# EAGLE board roco1044 (EAGLE 9.5.2)
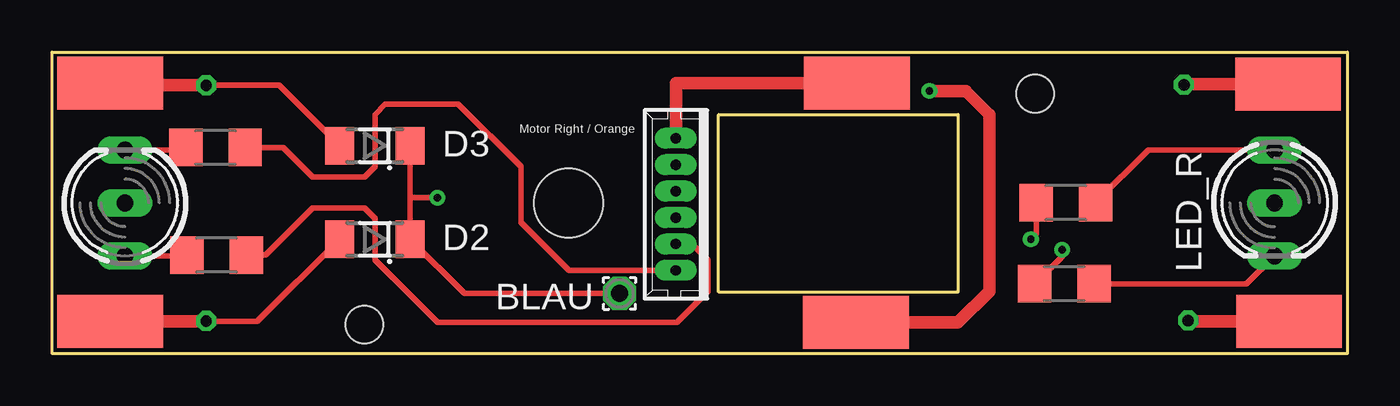
[diagram p0: board, top side]
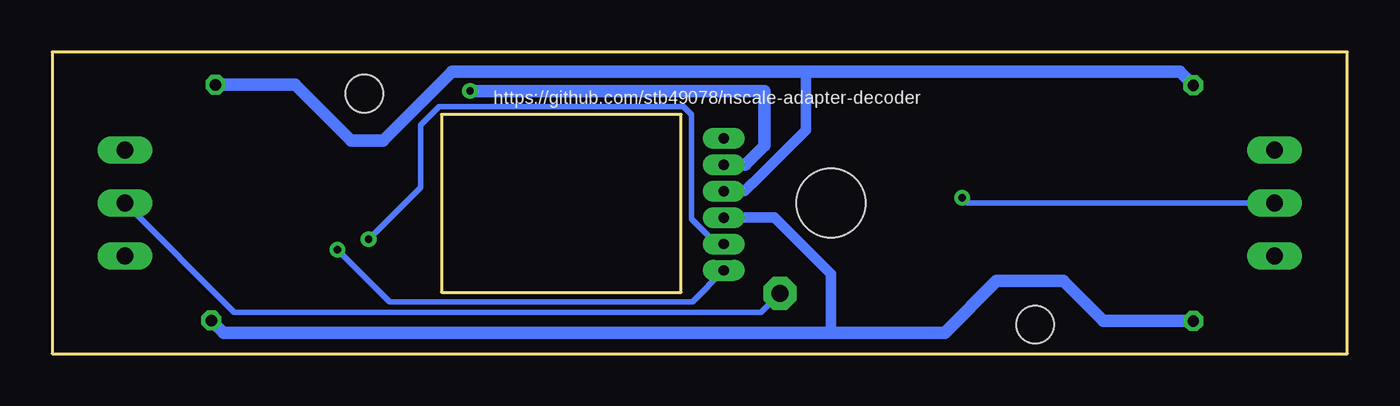
[diagram p1: board, bottom side, seen from below]

Size 62.2 x 14.5 mm. Coordinates in mm from the lower left corner, seen from the top.
Outline: 0,0 0,14.5 62.2,14.5 62.2,0 0,0
Copper layers (1*16): Top 0.035mm / dielectric 1.5mm / Bottom 0.035mm
Design rules "default *": minimum track width 6mil, minimum drill 0.35mm, track to track 6mil, track to pad 6mil, pad to pad 6mil, via to via 6mil, smd to smd 6mil, copper to edge 20mil, drill to drill 6mil, minimum pad ring 10mil, minimum via ring 8mil, stop-mask expansion 4mil, vias tented up to drill 0mil, thermal gap 10mil
Holes 1.8 mm at 15,1.4 47.2,12.5
Holes 3.3 mm at 24.8,7.25
Milling: 4 lines

## Footprints (pad centres in the part's own frame; a part is rotated, then mirrored left to right if it is on the bottom)
53047-06 = drill 0.5 pad 0.698 long: 1 3.175,0; 2 1.905,0; 3 0.635,0; 4 -0.635,0; 5 -1.905,0; 6 -3.175,0
1,6/0,8 = drill 0.813 pad 1.6 octagon: 1 0,0
SOD80_DO213AA_MINIMELF = smd 1.4 x 1.8: A 1.7,0; C -1.7,0
DUOLED-A-5MM = drill 0.813 long: A 0,0; CR 2.54,0; CX -2.54,0
SMD2,54-5,08 = smd 2.54 x 5.08: 1 0,0
R1206 = smd 1.6 x 1.803: 1 -1.422,0; 2 1.422,0

## Placement (x,y rotation side)
651  NEM_651-TS  [53047-06]  29.95,7.18 90 top
BLAU  [1,6/0,8]  27.25,2.9 180 top
D2  LL4148  [SOD80_DO213AA_MINIMELF]  15.5,5.5 180 top
D3  LL4148  [SOD80_DO213AA_MINIMELF]  15.5,10 180 top
LED_F  [DUOLED-A-5MM]  3.5,7.25 90 top
LED_R  [DUOLED-A-5MM]  58.7,7.25 270 top
M-L  [SMD2,54-5,08]  38.6,1.5 90 top
M-R  [SMD2,54-5,08]  38.65,13 90 top
R1  [R1206]  48.61,3.36 0 top
R2  [R1206]  48.68,7.26 0 top
R3  [R1206]  7.85,9.91 0 top
R4  [R1206]  7.91,4.74 0 top
TR-L-1  [SMD2,54-5,08]  2.8,1.55 90 top
TR-L-2  [SMD2,54-5,08]  59.4,1.55 90 top
TR-R-1  [SMD2,54-5,08]  2.8,13 90 top
TR-R-2  [SMD2,54-5,08]  59.35,12.95 270 top

## Library data of the parts
651 = con-nem
BLAU M-L M-R TR-L-1 TR-L-2 TR-R-1 TR-R-2 = wirepad
D2 D3 = _hhn_diodes_smd
LED_F LED_R = led
R1-R4 = rcl; SPICEPREFIX: R

## Nets
M-L: 651.2 M-L.1
M-R: 651.1 M-R.1
N$1: BLAU.1 D2.C D3.C LED_F.A LED_R.A
N$2: 651.4 D2.A TR-L-1.1 TR-L-2.1
N$3: 651.3 D3.A TR-R-1.1 TR-R-2.1
N$5: 651.5 R2.1 R4.2
N$6: LED_R.CR R1.2
N$7: LED_R.CX R2.2
N$8: 651.6 R1.1 R3.2
N$9: LED_F.CR R3.1
N$10: LED_F.CX R4.1

## Tracks (layer width: path | path; a pad name or v marks a point on that pad's centre or on a via)
M-L  (via drill 0.35)
  Top 0.61: M-L.1 43.5,1.5 45,3 45,11.5 43.87,12.63 v42.13,12.63
  Bottom 0.61: v42.13,12.63 28,12.63 28,10 28.91,9.09 651.2
M-R
  Top 0.61: M-R.1 29.95,13 651.1
N$1  (via drill 0.35)
  Top 0.254: BLAU.1 19.8,2.9 D2.C 17.2,7.5 | 17.2,7.5 D3.C | v18.5,7.5 17.2,7.5
  Bottom 0.254: LED_R.A 53.45,2 28.15,2 BLAU.1 | LED_F.A 18.25,7.25 v18.5,7.5
N$2  (via drill 0.55)
  Top 0.254: D2.A 9.85,1.55 7.35,1.55
  Top 0.61: v54.55,1.6 54.6,1.55 TR-L-2.1 | TR-L-1.1 7.35,1.55 7.4,1.5 v7.4,1.57
  Bottom 0.508: 651.4 27.51,6.54 24.8,3.84 24.8,1.02
  Bottom 0.61: v7.4,1.57 11.72,1.57 13.65,3.5 16.85,3.5 19.33,1.02 24.8,1.02 53.97,1.02 v54.55,1.6
N$3  (via drill 0.55)
  Top 0.254: D3.A 10.9,12.9 7.5,12.9
  Top 0.61: TR-R-2.1 54.37,12.95 v54.35,12.93 | TR-R-1.1 2.9,12.9 v7.4,12.9 7.5,12.9
  Bottom 0.508: 651.3 28.95,7.82 28.59,8.18 28.57,8.18 26,10.74 26,13.55
  Bottom 0.61: v54.35,12.93 50.53,12.93 47.85,10.25 46.3,10.25 43,13.55 26,13.55 8.05,13.55 v7.4,12.9
N$5  (via drill 0.35)
  Top 0.254: R2.1 47.26,5.76 v47,5.5 | R4.2 10.24,4.74 12.5,7 15,7 15.5,6.5 15.5,4.5 18.5,1.5 30,1.5 31.5,3 31.5,4.5 30.73,5.28 651.5
  Bottom 0.254: v47,5.5 44.5,8 44.5,11 43.63,11.87 31.87,11.87 31.5,11.5 31.5,6.48 30.29,5.28 651.5
N$6
  Top 0.254: LED_R.CR 57.35,3.36 R1.2
N$7
  Top 0.254: LED_R.CX 52.63,9.79 R2.2
N$8  (via drill 0.35)
  Top 0.254: R1.1 48.5,4.67 v48.5,5 | R3.2 11.09,9.91 12.5,8.5 15,8.5 15.5,9 15.5,11.5 16,12 19.5,12 22.52,8.98 22.52,6.3 24.81,4 651.6
  Bottom 0.254: v48.5,5 46,2.5 31.45,2.5 651.6
N$9
  Top 0.254: LED_F.CR 6.31,9.79 R3.1
N$10
  Top 0.254: LED_F.CX 6.45,4.71 R4.1

## Text on the board
tNames: Motor Right / Orange
bNames: https://github.com/stb49078/nscale-adapter-decoder